# Altium PCB PCB1.PcbDoc
Units mil, origin at the board's own origin, x right, y up, seen from the top; angles counter-clockwise.
Board outline 255 x 300 mil, 2 copper layers (Top Layer, Bottom Layer); 11 components, 6 nets, 49 pads, 16 vias.
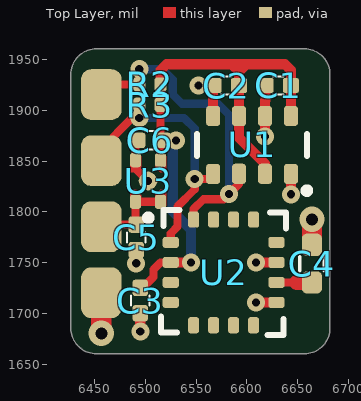
[diagram p0: Top Layer view]
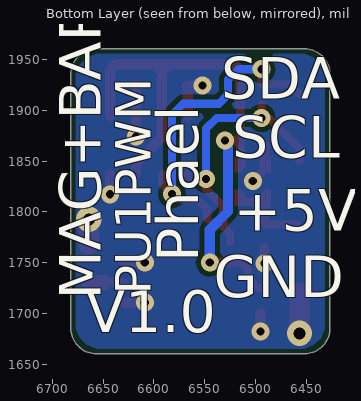
[diagram p1: Bottom Layer view, seen from below]
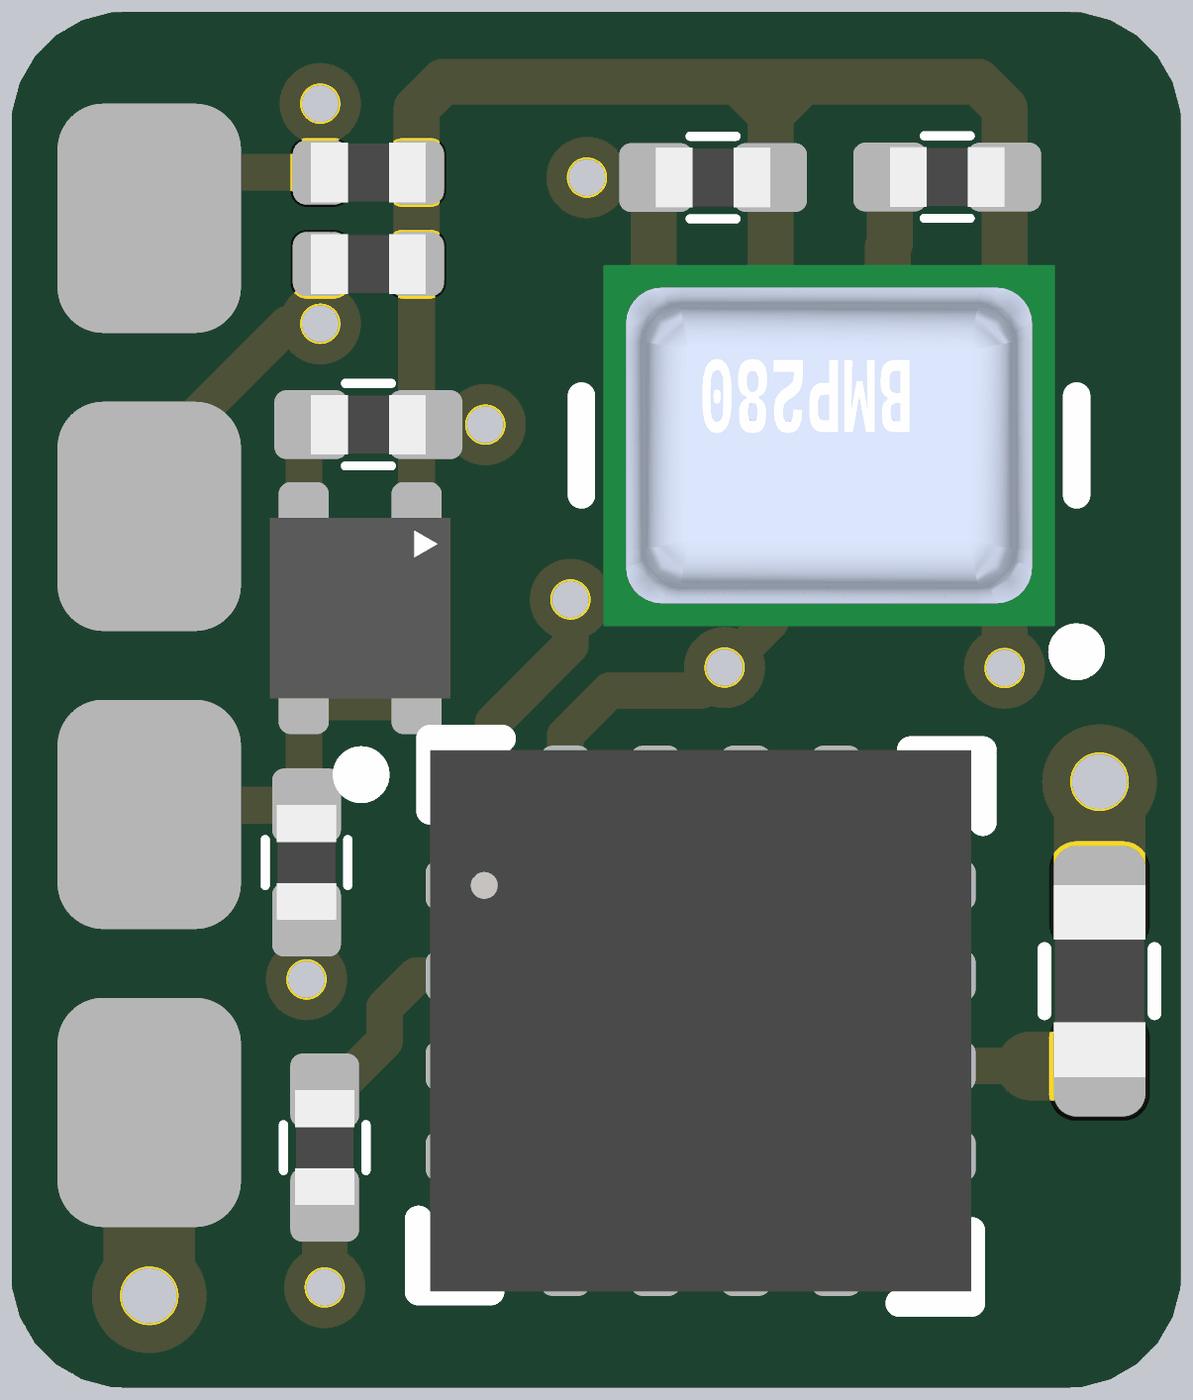
[diagram p2: 3D render of the assembled board from above, using the file's embedded part models]

## Layer stack, top to bottom
Top Solder: solder mask 0.4, Solder Resist, Dk 3.5
Top Layer: signal copper 1.4
Dielectric 1: dielectric 12.6, FR-4, Dk 4.8
Bottom Layer: signal copper 1.4
Bottom Solder: solder mask 0.4, Solder Resist, Dk 3.5

## Board outline
6426.72,1685.5 6426.72,1935.5 cw(c6451.72,1935.5) 6451.72,1960.5 6656.72,1960.5 cw(c6656.72,1935.5) 6681.72,1935.5 6681.72,1685.5 cw(c6656.72,1685.5) 6656.72,1660.5 6451.72,1660.5 cw(c6451.72,1685.5)

## Design rules (kind name [scope] priority, off if disabled: settings)
Clearance [All] p1: gap=5 ignorepadtopadclearanceinfootprint=FALSE except(0: Arc-Hole Track-Hole SMDPad-Hole THPad-Hole Via-Hole Fill-Hole Poly-Hole Region-Hole Text-Hole)
PlaneClearance [All] p1: clearance=8
PolygonConnect [All] p1: connectstyle=Relief reliefconductorwidth=10 reliefentries=4 polygonreliefangle="90 Angle" airgapwidth=10
RoutingVias [All] p1: holewidth=28 width=50 viastyle="Through Hole" minholewidth=8 minwidth=17.72 maxholewidth=28 maxwidth=50
SolderMaskExpansion [All] p1: expansion=4 istentingtop=FALSE
Width [All] p1: maxlimit=20 minlimit=8 preferedwidth=10
29 further rules are at their usual default settings.

## Components (designator, comment, footprint, x,y, rotation, side; value= is the part's Value field where it differs from the comment)
C1 "100nF" C0201_M 6630.78,1924.5 r180 top
C2 "100nF" C0201_M 6579.7,1924.39 r0 top
C3 "100nF" C0201_M 6495,1712.82 r90 top
C4 "4.7uF" C0402_N 6664,1749.13 r90 top
C5 "1uF" C0201_M 6491.03,1775 r270 top
C6 "1uF" C0201_M 6504.53,1870.5 r180 top
R2 "4.7kR" R0201_L 6504.53,1925.5 r180 top
R3 "4.7kR" R0201_L 6504.53,1905.5 r180 top
U1 "''" LGA-8 6605,1865.95 r270 top locked
U2 "''" LGA-16_3X3 6577,1740.47 r0 top
U3 "''" UDFN-4 6502.72,1830.5 r270 top

## Footprints (in the part's own frame and the unit in brackets; to place one, negate y for a bottom-side part, rotate by r counter-clockwise, add the part's x,y. Pads: shape width x height; smd on the part's side, far side on the other; paste and mask are expansions set on the pad)
C0201_M [mil]
  rrect35% 16x15 smd paste+0 mask+0: 1(-12.5,0) 2(12.5,0)
  silkscreen extent -5,-9 5,9, body extent -13,-6 13,6, height 10
C0402_N [mil]
  rrect50% 22x20 smd paste+0 mask+1: 1(-18.5,0) 2(18.5,0)
  silkscreen extent -7,-12 7,12, body extent -21,-10 21,10, height 28
LGA-8 [mil]
  rrect50% 20x14 smd paste+0 mask+0: 1(28.54,38.28) 2(28.43,12.8) 3(28.43,-12.8) 4(28.54,-38.28) 5(-28.54,-38.28) 6(-28.43,-12.8) 7(-28.43,12.8) 8(-28.54,38.28)
  silkscreen extent -11,-54 46,55, body extent -39,-49 39,49, height 39
LGA-16_3X3 [mil]
  rrect50% 16x11 smd mask+0: 1(-52,29.53) 2(-52,9.84) 3(-52,-9.84) 4(-52,-29.53) 9(52,-29.53) 10(52,-9.84) 11(52,9.84) 12(52,29.53)
  rrect50% 11x16 smd mask+0: 5(-29.53,-52) 6(-9.84,-52) 7(9.84,-52) 8(29.53,-52) 13(29.53,52) 14(9.84,52) 15(-9.84,52) 16(-29.53,52)
  silkscreen extent -75,-62 62,62, body extent -59,-59 59,59, height 35
R0201_L [mil]
  rrect50% 12x14 smd mask+0.5: 1(-10.5,0) 2(10.5,0)
  body extent -13,-6 13,6, height 10
UDFN-4 [mil]
  rrect50% 14x11 smd mask+0: 1(-20.5,12.3) 2(-20.5,-12.3) 3(20.5,-12.3) 4(20.5,12.3)
  rrect50% 15.56x15.56 smd rot 45 mask+0: 5(0,0)
  Top Layer region: 8.5,17.8 24.5,17.8 24.5,6.8 13.5,6.8 8.5,11.8
  Top Layer region: 8.5,-17.8 24.5,-17.8 24.5,-6.8 13.5,-6.8 8.5,-11.8
  Top Layer region: -8.5,-17.8 -24.5,-17.8 -24.5,-6.8 -13.5,-6.8 -8.5,-11.8
  Top Layer region: -8.5,17.8 -24.5,17.8 -24.5,6.8 -13.5,6.8 -8.5,11.8
  body extent -20,-20 20,20, height 24

## Part data
C1 C2 C3: library part Capacitor, "Cap Ceramic 0.1uF 25V X5R 10% SMD 0201 85°C Paper T/R", Manufacturer=Yageo, Manufacturer Part Number=CC0201KRX5R8BB104, Supplier Part Number=13-CC0201KRX5R8BB104CT-ND, Category="Ceramic Capacitors", ComponentLink1Description=https://www.yageo.com/upload/media/product/productsearch/datasheet/mlcc/UPY-GPHC_X5R_4V-to-50V_26.pdf?src-supplier=Digi-Key, ComponentLink1URL=https://www.yageo.com/upload/media/product/productsearch/datasheet/mlcc/UPY-GPHC_X5R_4V-to-50V_26.pdf?src-supplier=Digi-Key, Pricing="1=0,10000, 10=0,06500, 50=0,03560, 100=0,02900, 500=0,02072, 1000=0,01628, 2500=0,01480, 5000=0,01361 (USD)", RoHS=Yes, RoHS Compliant=Yes, Stock=60990, Supplier=Digi-Key, User_Description="Cap Ceramic 0.1uF 25V X5R 10% SMD 0201 85°C Paper T/R"
C4: library part Capacitor, "贴片电容（MLCC） 0402", Manufacturer="Taiyo Yuden", Manufacturer Part Number=EDK105BBJ475MVLF, Supplier Part Number=C412302, Pricing="50=0,01000, 500=0,00800, 1500=0,00700, 10000=0,00630, 20000=0,00580, 50000=0,00540 (USD)", RoHS=No, Stock=204180, Supplier=LCSC, User_Description="贴片电容（MLCC） 0402"
C5 C6: library part Capacitor, "Cap Cer 1UF 10V X5R 0201", Case/Package=Ceramic, Dielectric=C0G, Manufacture Part Number=CM03X5R105M10AH, Manufacturer="Kyocera AVX", Max Operating Temperature=85°C, Min Operating Temperature=-55°C, Supplier Part Number 1=478-CM03X5R105M10AHCT-ND, Tolerance=20%, Category="Ceramic Capacitors", Lead Free="Lead Free", Length=0.6mm, Mounting Technology="Surface Mount", Packaging="Tape and Reel", Pricing 1="1=0,13000, 10=0,09200, 50=0,05240, 100=0,04350, 500=0,03050, 1000=0,02525, 2500=0,02350, 5000=0,02150 (USD)", RoHS=Yes, Stock 1=539073, Supplier 1=Digi-Key, Termination=Wraparound, User_Description="Cap Cer 1UF 10V X5R 0201"
R2 R3: library part Resistor_EU, "Res Thick Film 0201 4.7K Ohm 1% 1/20W ±200ppm/°C Molded SMD SMD Paper T/R", Case Code (Imperial)=0201, Case Code (Metric)=0603, Manufacturer=Yageo, Manufacturer Part Number=RC0201FR-074K7L, Max Operating Temperature=125°C, Max Power Dissipation=50mW, Min Operating Temperature=-55°C, Package Quantity=1, Resistance Tolerance=1%, Resistor Type="Thick Film", Supplier Part Number=311-4.70KMCT-ND, Temperature Coefficient=200ppm/°C, Voltage Rating=25V, Case/Package=0201, Category="Chip SMD Resistors", ComponentLink1Description=https://datasheet.ciiva.com/7672/1563626-7672233.pdf?src-supplier=Element14, ComponentLink1URL=https://datasheet.ciiva.com/7672/1563626-7672233.pdf?src-supplier=Element14, ComponentLink2Description=https://datasheet.ciiva.com/2493/pyu-r-int-thick-7-2493812.pdf?src-supplier=Digi-Key, ComponentLink2URL=https://datasheet.ciiva.com/2493/pyu-r-int-thick-7-2493812.pdf?src-supplier=Digi-Key, ComponentLink3Description=https://datasheet.ciiva.com/2493/pyu-r-int-thick-7-2493813.pdf?src-supplier=Digi-Key, ComponentLink3URL=https://datasheet.ciiva.com/2493/pyu-r-int-thick-7-2493813.pdf?src-supplier=Digi-Key, ComponentLink4Description=https://datasheet.ciiva.com/2493/pyu-r-int-thick-7-2493811.pdf?src-supplier=Digi-Key, ComponentLink4URL=https://datasheet.ciiva.com/2493/pyu-r-int-thick-7-2493811.pdf?src-supplier=Digi-Key, ComponentLink5Description=https://datasheet.ciiva.com/8892/pyu-rc0201-51-rohs-l-8-8892942.pdf?src-supplier=Avnet, ComponentLink5URL=https://datasheet.ciiva.com/8892/pyu-rc0201-51-rohs-l-8-8892942.pdf?src-supplier=Avnet, Construction=Rectangular, Contact Plating=Tin,Matte, Depth=0.3mm, Features="Moisture Resistant", Height=0.01inch, Lead Free="Lead Free", Length=0.6mm, Military Standard=Not, Number of Terminations=2, Packaging="Tape and Reel", Power Rating=50mW, Pricing="1=0,10000, 10=0,03700, 100=0,01500, 1000=0,00672, 2500=0,00583, 5000=0,00482 (USD)", Radiation Hardening=No, RoHS=Yes, RoHS Compliant=Yes, Series=RC, Stock=5686873, Supplier=Digi-Key, Termination=SMD/SMT, Tolerance=1%, User_Description="Res Thick Film 0201 4.7K Ohm 1% 1/20W ±200ppm/°C Molded SMD SMD Paper T/R", Weight=6E-06oz, Width=0.012inch
U1: library part BMP280
U2: library part QMC5883P
U3: library part MIC5365-3.3YMT-TZ

## Free pads (board coordinates)
  rrect50% 40x50 smd mask+0: 1(6456.72,1720.5) 2(6456.72,1785.5) 3(6456.72,1850.5) 4(6456.72,1915.5)

## Via types
v1: diameter 17.72, hole 8, Top Layer to Bottom Layer, tented both sides, 13 vias
v2: diameter 25, hole 12, Top Layer to Bottom Layer, tented both sides, 2 vias
v3: diameter 17.72, hole 8, Top Layer to Bottom Layer, 1 vias

## Nets (pads, with @x,y where several pads share a name; then routed paths per layer and width w, separated by ;. In a path a pad name is that pad's centre, name@x,y a point inside that pad or via, vN(x,y) a via of type N, cw(c..) or ccw(c..) an arc to the next point about the centre after c; other vN are vias at no path point)
+5V: C5.1 pad.2 U3.3 U3.4 | length 82.5
  Top Layer w8: pad.2 6458.72,1787.5 C5.1 6490.42,1788.1 U3.3 U3.4
GND: C1.2 C2.1 C3.1 C4.2 C5.2 C6.2 pad.1 U1.1 U1.5 U1.7 U2.9 U2.11 U3.2 U3.5 | length 300
  Top Layer w8: C6.2@6494.03,1870.5 6490.42,1866.89 U3.2 6490.42,1842.8 v3(6502.72,1830.5)
  Top Layer w10: v1(6491.03,1749.5) C5.2@6491.03,1764.5 ; v1(6495,1682.32) C3.1 ; v1(6552.2,1924.39) C2.1 6566.72,1923.91 U1.5 ; v1(6609,1710.94) U2.9 ; v1(6609,1750.32) U2.11 ; v1(6617.8,1874.39) U1.7 6617.8,1909.39 6618.28,1909.87 C1.2 ; v1(6643.28,1817.41) U1.1
  Top Layer w20: v2(6456.72,1680.5) pad.1 ; C4.2 v2(6664,1792.63)
NetC4_1: C4.1 U2.10 | length 35
  Top Layer w8: U2.10 6649,1730.63
  Top Layer w15: 6649,1730.63 C4.1
SCL: pad.3 R3.2 U1.4 U2.1 | length 275.5
  Top Layer w8: pad.3 6456.72,1862.19 6487.03,1892.5 v1(6494.03,1892.5) R3.2 ; U2.1 6525,1778.77 6531.72,1785.5 6531.72,1805.5 6548.59,1822.36 v1(6548.59,1832.36) 6561.82,1832.36 U1.4@6566.79,1837.34
  Bottom Layer w8: v1(6494.03,1892.5) 6538.16,1892.5 6548.59,1882.06 v1(6548.59,1832.36)
SDA: pad.4 R2.2 U1.3 U2.16 | length 322.1
  Top Layer w8: pad.4 pad.4@6466.72,1925.5 ; pad.4@6468.03,1925.5 R2.2@6492.03,1925.5 ; R2.2 v1(6494.03,1940.5) ; U2.16 6547.47,1802.79 6557.2,1812.52 6577.2,1812.52 v1(6582.2,1817.52) 6592.2,1827.52 U1.3
  Bottom Layer w8: v1(6494.03,1940.5) 6517.03,1940.5 6527.03,1930.5 6527.03,1915.5 6536.03,1906.5 6571.38,1906.5 6582.2,1895.67 v1(6582.2,1817.52)
VCC: C1.1 C2.2 C3.2 C6.1 R2.1 R3.1 U1.2 U1.6 U1.8 U2.2 U3.1 | length 606.7
  Top Layer w8: C3.2 6497.35,1725.32 6508.03,1736 6508.03,1743.34 6515,1750.32 U2.2 ; U3.1 6515.03,1870.5 R3.1
  Top Layer w10: C6.1@6515.03,1870.5 C6.1 v1(6530.03,1870.5) ; R3.1 R2.1 6515.03,1939.5 6520.85,1945.32 6585,1945.32 ; U2.2 v1(6545,1750.32) ; U1.2 6617.8,1847.52 6592.2,1873.11 U1.6 C2.2 6592.2,1938.11 ; U1.8 C1.1 6643.28,1939.5 6637.46,1945.32 6599.41,1945.32 ; 6585,1945.32 6599.41,1945.32 ; 6585,1945.32 6592.2,1938.11 ; 6592.2,1938.11 6599.41,1945.32
  Bottom Layer w10: v1(6530.03,1870.5) 6527.03,1867.5 6527.03,1800.5 6545,1782.52 v1(6545,1750.32)
pads on no net: U2.3 U2.4 U2.5 U2.6 U2.7 U2.8 U2.12 U2.13 U2.14 U2.15

## Polygon pours and split planes (outlines as drawn)
GND on Bottom Layer "Bottom Layer-GND" (solid, pour order 1): 6431.72,1690.5 ccw(c6456.72,1690.5) 6456.72,1665.5 6651.72,1665.5 ccw(c6651.72,1690.5) 6676.72,1690.5 6676.72,1930.5 ccw(c6651.72,1930.5) 6651.72,1955.5 6456.72,1955.5 ccw(c6456.72,1930.5) 6431.72,1930.5

## Silkscreen, mask and mechanical layers (free items; w line width, h text height)
Bottom Overlay:
  text "SDA" at 6533.73,1897.61 h70
  text "SCL" at 6522.89,1839.71 h70
  text "+5V" at 6521.63,1767.61 h70
  text "Phael" at 6542.8,1750.33 h70 r270
  text "PU1PWM" at 6591.21,1718.28 h60 r270
  text "MAG+BAR" at 6638.45,1713.67 h70 r270
  text "GND" at 6541.09,1702.42 h70
  text "V1.0" at 6666.72,1668.02 h70
Mechanical 1:
  the board outline again, w2